# Altium PCB MCUBreakout.PcbDoc
Units mil, origin at the board's own origin, x right, y up, seen from the top; angles counter-clockwise.
Board outline 1377.95 x 1220.47 mil, 2 copper layers (Top Layer, Bottom Layer); 13 components, 30 nets, 93 pads, 24 vias.
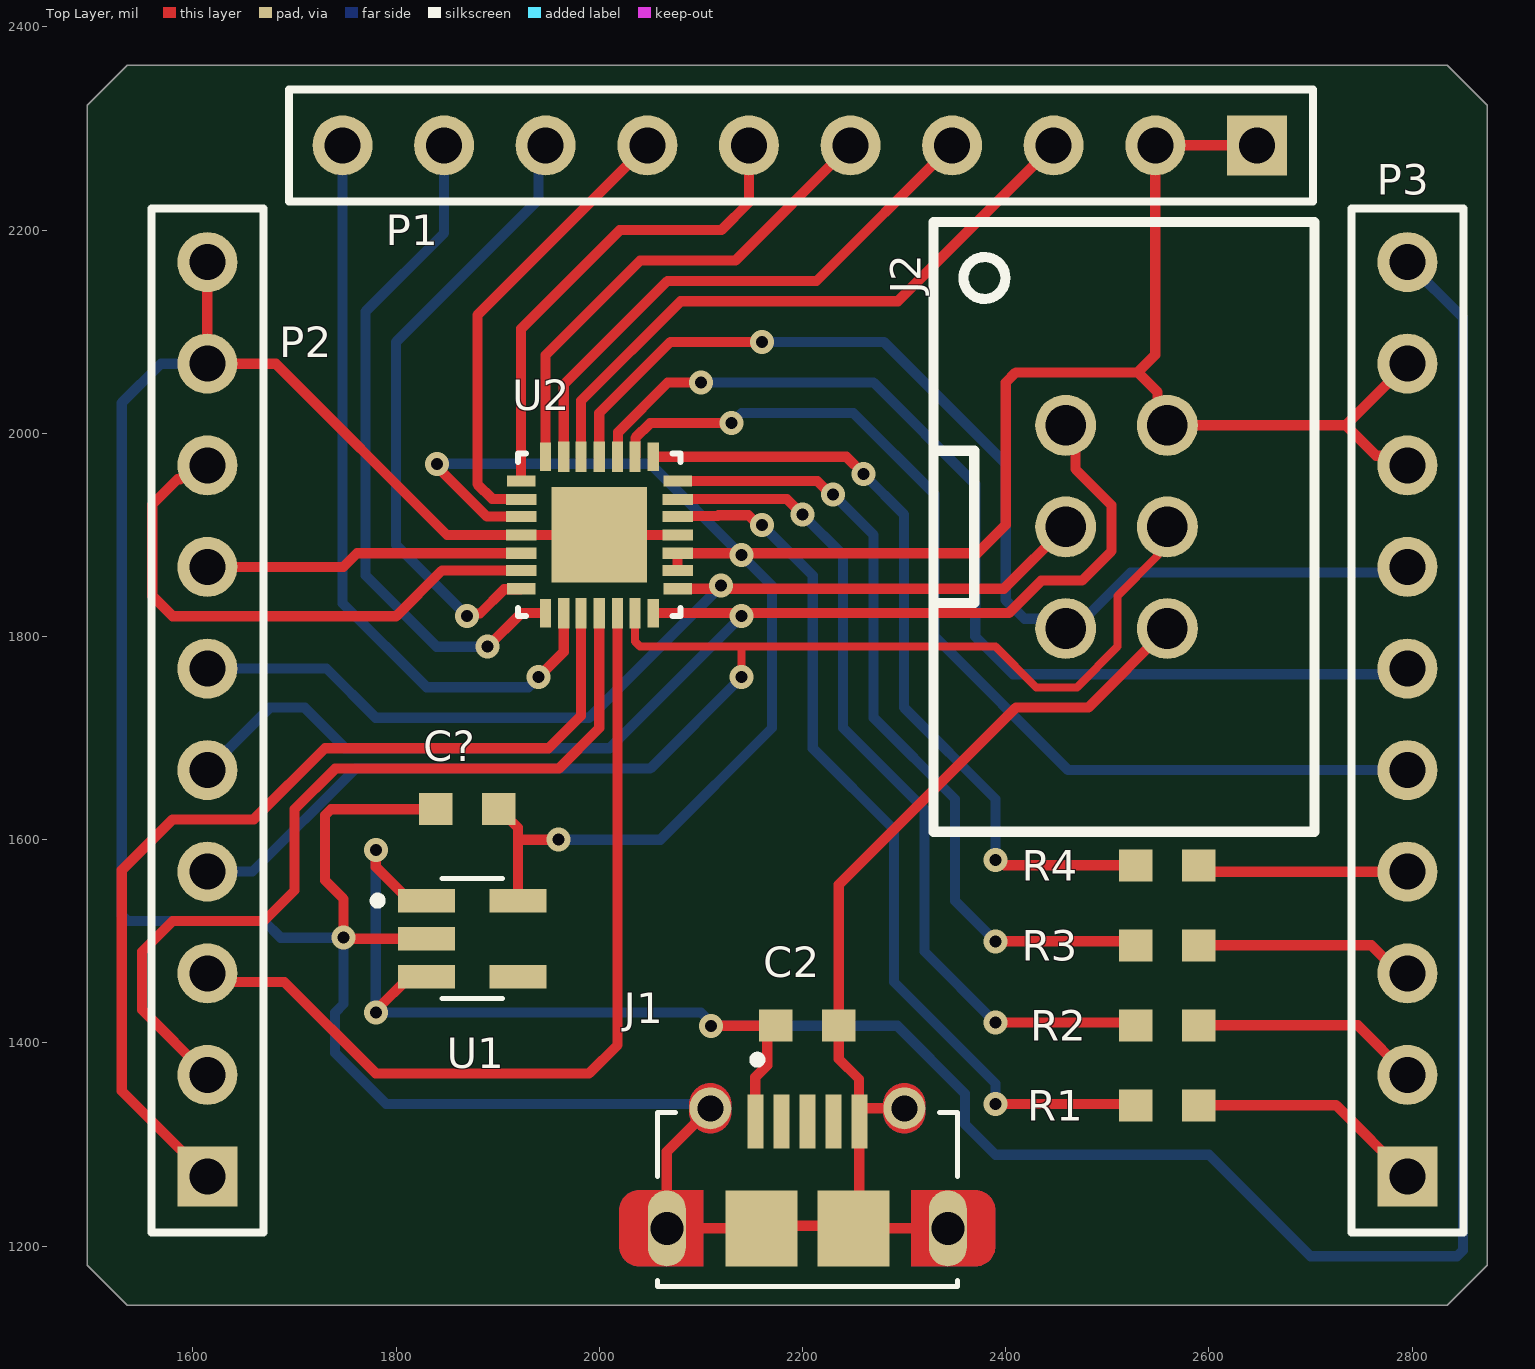
[diagram p0: Top Layer view]
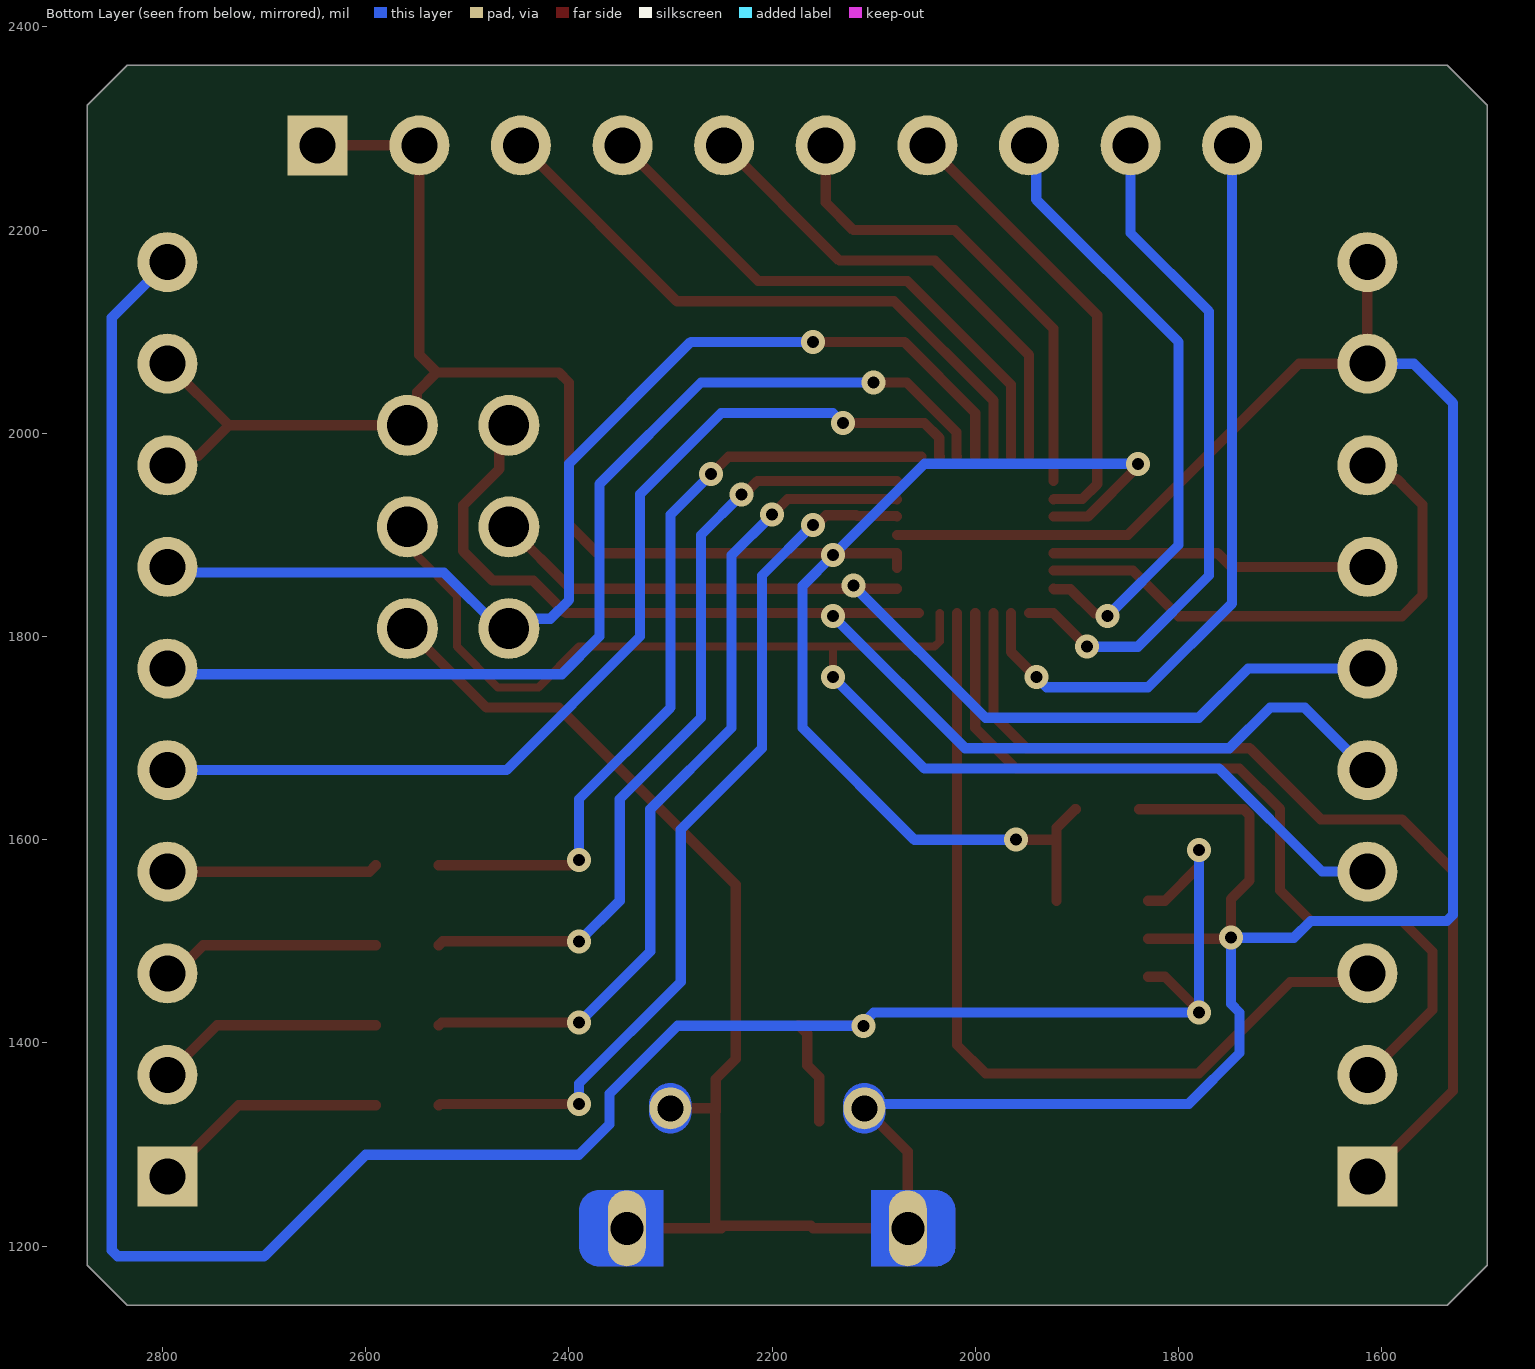
[diagram p1: Bottom Layer view, seen from below]
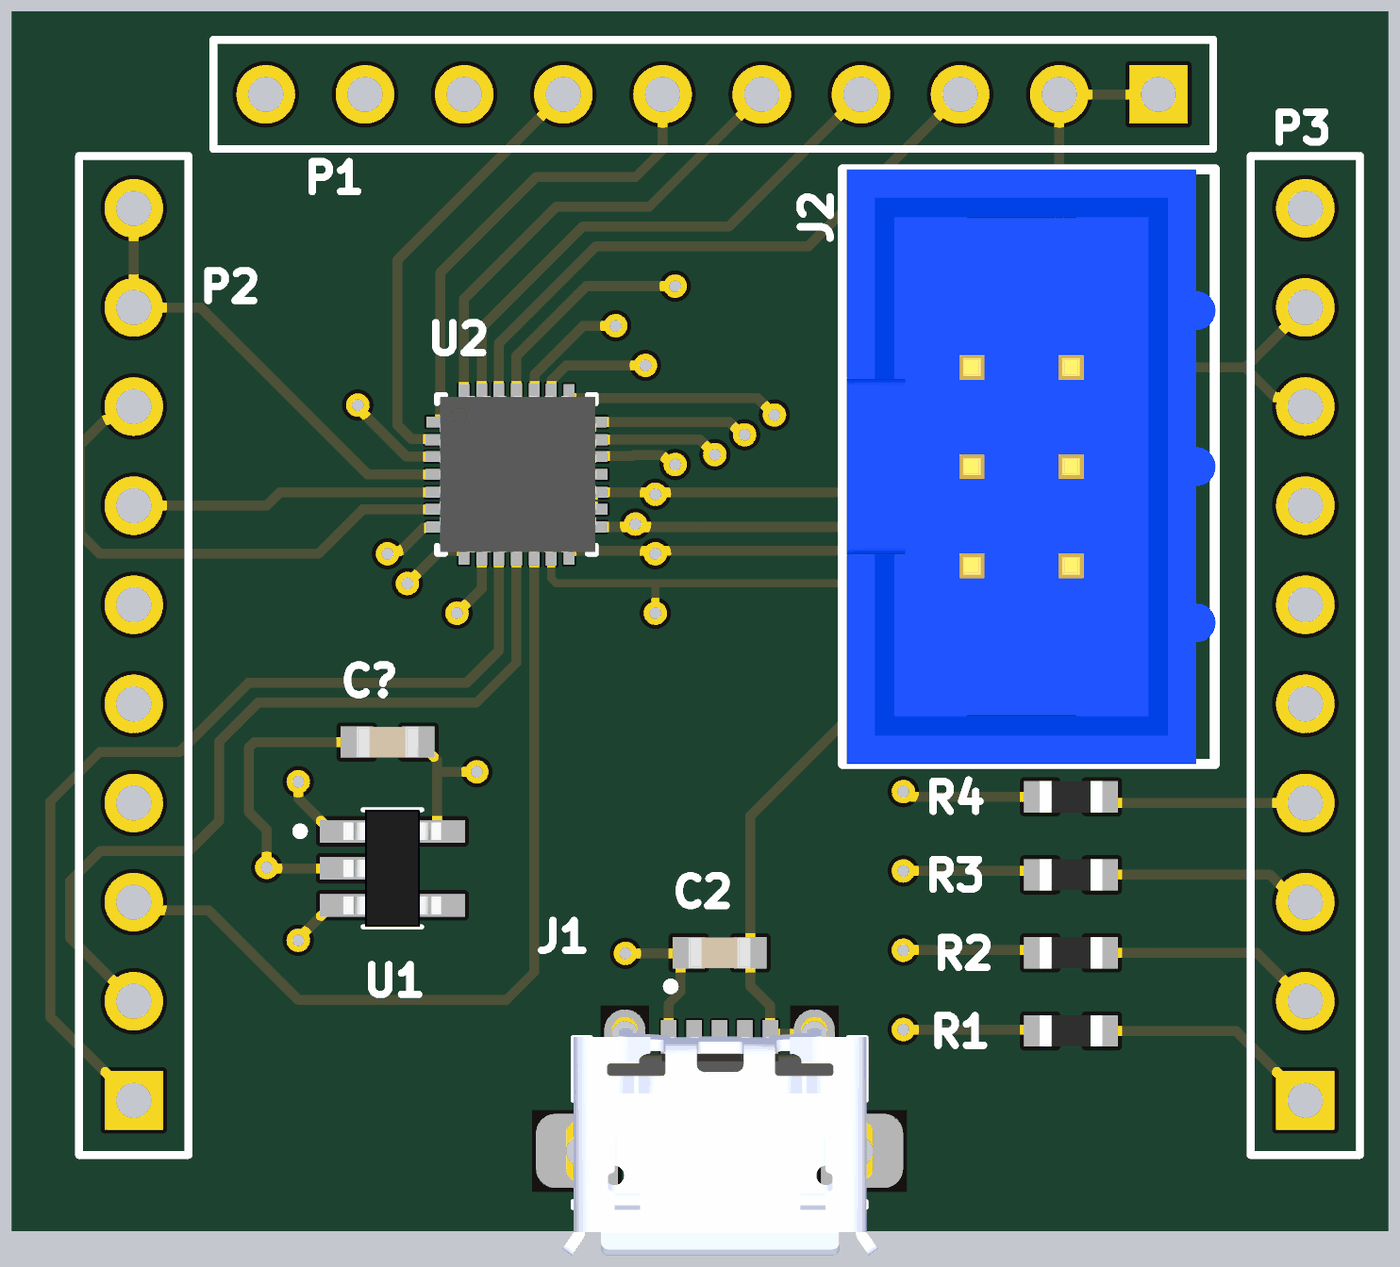
[diagram p2: 3D render of the assembled board from above, using the file's embedded part models]

## Layer stack, top to bottom
Top Solder: solder mask 0.4, Solder Resist, Dk 3.5
Top Layer: signal copper 1.4
Dielectric 1: dielectric 12.6, FR-4, Dk 4.8
Bottom Layer: signal copper 1.4
Bottom Solder: solder mask 0.4, Solder Resist, Dk 3.5

## Board outline
1496.06,1181.1 1535.43,1141.73 2834.65,1141.73 2874.02,1181.1 2874.02,2322.83 2834.65,2362.2 1535.43,2362.2 1496.06,2322.83

## Design rules (kind name [scope] priority, off if disabled: settings)
Clearance [All] p1: gap=6 ignorepadtopadclearanceinfootprint=FALSE
MinimumSolderMaskSliver [All] p1: minsoldermaskwidth=2
PolygonConnect [All] p1: connectstyle=Relief reliefconductorwidth=10 reliefentries=4 polygonreliefangle="90 Angle" airgapwidth=10
RoutingVias [All] p1: holewidth=28 width=50 viastyle="Through Hole" minholewidth=28 minwidth=50 maxholewidth=28 maxwidth=50
SilkToSilkClearance [All] p1: silktosilkclearance=5
SilkToSolderMaskClearance [IsPad] p1: minsilkscreentomaskgap=2 clearancetoexposedcopper=TRUE
SolderMaskExpansion [All] p1: expansion=4 istentingtop=FALSE
Width [All] p1: maxlimit=300 minlimit=7 preferedwidth=10
27 further rules are at their usual default settings.

## Components (designator, comment, footprint, x,y, rotation, side; value= is the part's Value field where it differs from the comment)
C2 "1nF" 0603_CAP 2204.72,1417.32 r180 top
C? "1nF" 0603_CAP 1870,1630 r0 top
J1 "ZX62D-B-5P8" Micro_USB 2204.72,1220.47 r0 top
J2 "6 Pin ISP Header" CONN_ISP_M 2459.06,2007.87 r270 top
P1 "HEADER_1x10" PIN10 2647.24,2283.46 r180 top
P2 "HEADER_1x10" PIN10 1614.17,1268.5 r90 top
P3 "HEADER_1x10" PIN10 2795.28,1268.5 r90 top
R1 "0Ω" 0603_RES 2559.06,1338.58 r0 top
R2 "0Ω" 0603_RES 2559.06,1417.32 r0 top
R3 "0Ω" 0603_RES 2559.06,1496.06 r0 top
R4 "0Ω" 0603_RES 2559.06,1574.8 r0 top
U1 "NCV551SN30T1G" TSOP-5-N 1874.92,1502.6 r0 top
U2 "ATMEGA328-MMHR" QFN-28_4x4 2000,1900 r0 top

## Footprints (in the part's own frame and the unit in brackets; to place one, negate y for a bottom-side part, rotate by r counter-clockwise, add the part's x,y. Pads: shape width x height; smd on the part's side, far side on the other; paste and mask are expansions set on the pad)
0603_CAP [mil]
  rect 33x31.5 smd: 1(-31,0) 2(31,0)
  body extent -32,-16 31,16, height 32
0603_RES [mil]
  rect 33x31.5 smd: 1(-31,0) 2(31,0)
  body extent -31,-16 31,16, height 18
CONN_ISP_M [mil]
  round 60 hole 40 mask+0: 1(0,0) 2(0,100) 3(100,0) 4(100,100) 5(200,0) 6(200,100)
  silkscreen extent -200,-130 400,245, body extent -200,-126 400,246, height 359
Micro_USB [mm]
  rect 0.4x1.35 smd mask+0.051: 1(-1.3,2.6) 2(-0.65,2.6) 3(0,2.6) 4(0.65,2.6) 5(1.3,2.6)
  round 1.05 hole 0.65: S1(-2.425,2.925) S2(2.425,2.925)
  oval 0.95x1.9 hole 0.825: S3(-3.512,-0.075) S6(3.512,-0.075)
  rect 1.8x1.9 smd: S4(-1.15,-0.075) S5(1.15,-0.075)
  Top Layer region: 3.1,-0.075 2.6,-0.075 2.6,0.875 4.2,0.875 4.213,0.875 4.239,0.874 4.265,0.871 4.291,0.867 4.317,0.861 4.342,0.855 4.367,0.846 4.391,0.837 4.415,0.826 4.439,0.815 4.461,0.801 4.483,0.787 4.504,0.772 4.525,0.755 4.544,0.738 4.563,0.719 4.58,0.7 4.597,0.679 4.612,0.658 4.626,0.636 4.64,0.614 4.651,0.59 4.662,0.566 4.671,0.542 4.68,0.517 4.686,0.492 4.692,0.466 4.696,0.44 4.699,0.414 4.7,0.388 4.7,0.375 4.7,-0.075 3.925,-0.075 3.925,0.4 3.925,0.407 3.924,0.422 3.923,0.436 3.92,0.45 3.917,0.464 3.914,0.478 3.909,0.492 3.904,0.505 3.898,0.518 3.892,0.531 3.885,0.544 3.877,0.556 3.868,0.567 3.859,0.579 3.85,0.589 3.839,0.6 3.829,0.609 3.817,0.618 3.806,0.627 3.794,0.635 3.781,0.642 3.768,0.648 3.755,0.654 3.742,0.659 3.728,0.664 3.714,0.667 3.7,0.67 3.686,0.673 3.672,0.674 3.657,0.675 3.65,0.675 3.4,0.675 3.392,0.675 3.376,0.674 3.361,0.673 3.345,0.67 3.33,0.667 3.315,0.663 3.3,0.658 3.285,0.652 3.271,0.646 3.257,0.639 3.243,0.631 3.23,0.622 3.217,0.613 3.205,0.603 3.193,0.593 3.182,0.582 3.172,0.57 3.162,0.558 3.153,0.545 3.144,0.532 3.136,0.518 3.129,0.504 3.123,0.49 3.117,0.475 3.112,0.46 3.108,0.445 3.105,0.43 3.102,0.414 3.101,0.399 3.1,0.383 3.1,0.375 3.1,-0.075
  Top Layer region: -3.1,-0.075 -2.6,-0.075 -2.6,-1.025 -4.2,-1.025 -4.213,-1.025 -4.239,-1.024 -4.265,-1.021 -4.291,-1.017 -4.317,-1.011 -4.342,-1.005 -4.367,-0.996 -4.391,-0.987 -4.415,-0.976 -4.439,-0.965 -4.461,-0.951 -4.483,-0.937 -4.504,-0.922 -4.525,-0.905 -4.544,-0.888 -4.563,-0.869 -4.58,-0.85 -4.597,-0.829 -4.612,-0.808 -4.626,-0.786 -4.64,-0.764 -4.651,-0.74 -4.662,-0.716 -4.671,-0.692 -4.68,-0.667 -4.686,-0.642 -4.692,-0.616 -4.696,-0.59 -4.699,-0.564 -4.7,-0.538 -4.7,-0.525 -4.7,-0.075 -3.925,-0.075 -3.925,-0.55 -3.925,-0.557 -3.924,-0.572 -3.923,-0.586 -3.92,-0.6 -3.917,-0.614 -3.914,-0.628 -3.909,-0.642 -3.904,-0.655 -3.898,-0.668 -3.892,-0.681 -3.885,-0.694 -3.877,-0.706 -3.868,-0.717 -3.859,-0.729 -3.85,-0.739 -3.839,-0.75 -3.829,-0.759 -3.817,-0.768 -3.806,-0.777 -3.794,-0.785 -3.781,-0.792 -3.768,-0.798 -3.755,-0.804 -3.742,-0.809 -3.728,-0.814 -3.714,-0.817 -3.7,-0.82 -3.686,-0.823 -3.672,-0.824 -3.657,-0.825 -3.65,-0.825 -3.4,-0.825 -3.392,-0.825 -3.376,-0.824 -3.361,-0.823 -3.345,-0.82 -3.33,-0.817 -3.315,-0.813 -3.3,-0.808 -3.285,-0.802 -3.271,-0.796 -3.257,-0.789 -3.243,-0.781 -3.23,-0.772 -3.217,-0.763 -3.205,-0.753 -3.193,-0.743 -3.182,-0.732 -3.172,-0.72 -3.162,-0.708 -3.153,-0.695 -3.144,-0.682 -3.136,-0.668 -3.129,-0.654 -3.123,-0.64 -3.117,-0.625 -3.112,-0.61 -3.108,-0.595 -3.105,-0.58 -3.102,-0.564 -3.101,-0.549 -3.1,-0.533 -3.1,-0.525 -3.1,-0.075
  Top Layer region: 2.6,-1.025 4.2,-1.025 4.213,-1.025 4.239,-1.024 4.265,-1.021 4.291,-1.017 4.317,-1.011 4.342,-1.005 4.367,-0.996 4.391,-0.987 4.415,-0.976 4.439,-0.965 4.461,-0.951 4.483,-0.937 4.504,-0.922 4.525,-0.905 4.544,-0.888 4.563,-0.869 4.58,-0.85 4.597,-0.829 4.612,-0.808 4.626,-0.786 4.64,-0.764 4.651,-0.74 4.662,-0.716 4.671,-0.692 4.68,-0.667 4.686,-0.642 4.692,-0.616 4.696,-0.59 4.699,-0.564 4.7,-0.538 4.7,-0.525 4.7,-0.075 3.925,-0.075 3.925,-0.525 3.925,-0.533 3.924,-0.549 3.923,-0.564 3.92,-0.58 3.917,-0.595 3.913,-0.61 3.908,-0.625 3.902,-0.64 3.896,-0.654 3.889,-0.668 3.881,-0.682 3.872,-0.695 3.863,-0.708 3.853,-0.72 3.843,-0.732 3.832,-0.743 3.82,-0.753 3.808,-0.763 3.795,-0.772 3.782,-0.781 3.768,-0.789 3.754,-0.796 3.74,-0.802 3.725,-0.808 3.71,-0.813 3.695,-0.817 3.68,-0.82 3.664,-0.823 3.649,-0.824 3.633,-0.825 3.625,-0.825 3.4,-0.825 3.392,-0.825 3.376,-0.824 3.361,-0.823 3.345,-0.82 3.33,-0.817 3.315,-0.813 3.3,-0.808 3.285,-0.802 3.271,-0.796 3.257,-0.789 3.243,-0.781 3.23,-0.772 3.217,-0.763 3.205,-0.753 3.193,-0.743 3.182,-0.732 3.172,-0.72 3.162,-0.708 3.153,-0.695 3.144,-0.682 3.136,-0.668 3.129,-0.654 3.123,-0.64 3.117,-0.625 3.112,-0.61 3.108,-0.595 3.105,-0.58 3.102,-0.564 3.101,-0.549 3.1,-0.533 3.1,-0.525 3.1,-0.075 2.6,-0.075 2.6,-1.025
  Top Layer region: -2.6,0.875 -4.2,0.875 -4.213,0.875 -4.239,0.874 -4.265,0.871 -4.291,0.867 -4.317,0.861 -4.342,0.855 -4.367,0.846 -4.391,0.837 -4.415,0.826 -4.439,0.815 -4.461,0.801 -4.483,0.787 -4.504,0.772 -4.525,0.755 -4.544,0.738 -4.563,0.719 -4.58,0.7 -4.597,0.679 -4.612,0.658 -4.626,0.636 -4.64,0.614 -4.651,0.59 -4.662,0.566 -4.671,0.542 -4.68,0.517 -4.686,0.492 -4.692,0.466 -4.696,0.44 -4.699,0.414 -4.7,0.388 -4.7,0.375 -4.7,-0.075 -3.925,-0.075 -3.925,0.375 -3.925,0.383 -3.924,0.399 -3.923,0.414 -3.92,0.43 -3.917,0.445 -3.913,0.46 -3.908,0.475 -3.902,0.49 -3.896,0.504 -3.889,0.518 -3.881,0.532 -3.872,0.545 -3.863,0.558 -3.853,0.57 -3.843,0.582 -3.832,0.593 -3.82,0.603 -3.808,0.613 -3.795,0.622 -3.782,0.631 -3.768,0.639 -3.754,0.646 -3.74,0.652 -3.725,0.658 -3.71,0.663 -3.695,0.667 -3.68,0.67 -3.664,0.673 -3.649,0.674 -3.633,0.675 -3.625,0.675 -3.4,0.675 -3.392,0.675 -3.376,0.674 -3.361,0.673 -3.345,0.67 -3.33,0.667 -3.315,0.663 -3.3,0.658 -3.285,0.652 -3.271,0.646 -3.257,0.639 -3.243,0.631 -3.23,0.622 -3.217,0.613 -3.205,0.603 -3.193,0.593 -3.182,0.582 -3.172,0.57 -3.162,0.558 -3.153,0.545 -3.144,0.532 -3.136,0.518 -3.129,0.504 -3.123,0.49 -3.117,0.475 -3.112,0.46 -3.108,0.445 -3.105,0.43 -3.102,0.414 -3.101,0.399 -3.1,0.383 -3.1,0.375 -3.1,-0.075 -2.6,-0.075 -2.6,0.875
  Top Layer region: 2.425,2.5 2.425,2.3 2.411,2.3 2.384,2.301 2.356,2.304 2.329,2.309 2.302,2.314 2.276,2.321 2.25,2.33 2.224,2.34 2.199,2.351 2.174,2.363 2.151,2.377 2.128,2.392 2.105,2.408 2.084,2.426 2.063,2.444 2.044,2.463 2.026,2.484 2.008,2.505 1.992,2.528 1.977,2.551 1.963,2.574 1.951,2.599 1.94,2.624 1.93,2.65 1.921,2.676 1.914,2.702 1.909,2.729 1.904,2.756 1.901,2.784 1.9,2.811 1.9,2.825 1.9,3.025 1.9,3.039 1.901,3.066 1.904,3.094 1.909,3.121 1.914,3.148 1.921,3.174 1.93,3.2 1.94,3.226 1.951,3.251 1.963,3.276 1.977,3.299 1.992,3.322 2.008,3.345 2.026,3.366 2.044,3.387 2.063,3.406 2.084,3.424 2.105,3.442 2.128,3.458 2.151,3.473 2.174,3.487 2.199,3.499 2.224,3.51 2.25,3.52 2.276,3.529 2.302,3.536 2.329,3.541 2.356,3.546 2.384,3.549 2.411,3.55 2.425,3.55 2.425,3.35 2.416,3.35 2.399,3.349 2.383,3.347 2.366,3.345 2.349,3.341 2.333,3.337 2.316,3.331 2.301,3.325 2.285,3.318 2.27,3.311 2.255,3.302 2.241,3.293 2.227,3.283 2.214,3.272 2.201,3.261 2.189,3.249 2.178,3.236 2.167,3.223 2.157,3.209 2.148,3.195 2.139,3.18 2.132,3.165 2.125,3.149 2.119,3.134 2.113,3.117 2.109,3.101 2.105,3.084 2.103,3.067 2.101,3.051 2.1,3.034 2.1,3.025 2.1,2.825 2.1,2.816 2.101,2.799 2.103,2.783 2.105,2.766 2.109,2.749 2.113,2.733 2.119,2.716 2.125,2.701 2.132,2.685 2.139,2.67 2.148,2.655 2.157,2.641 2.167,2.627 2.178,2.614 2.189,2.601 2.201,2.589 2.214,2.578 2.227,2.567 2.241,2.557 2.255,2.548 2.27,2.539 2.285,2.532 2.301,2.525 2.316,2.519 2.333,2.513 2.349,2.509 2.366,2.505 2.383,2.503 2.399,2.501 2.416,2.5 2.425,2.5
  Top Layer region: 2.425,3.35 2.425,3.55 2.439,3.55 2.466,3.549 2.494,3.546 2.521,3.541 2.548,3.536 2.574,3.529 2.6,3.52 2.626,3.51 2.651,3.499 2.676,3.487 2.699,3.473 2.722,3.458 2.745,3.442 2.766,3.424 2.787,3.406 2.806,3.387 2.824,3.366 2.842,3.345 2.858,3.322 2.873,3.299 2.887,3.276 2.899,3.251 2.91,3.226 2.92,3.2 2.929,3.174 2.936,3.148 2.941,3.121 2.946,3.094 2.949,3.066 2.95,3.039 2.95,3.025 2.95,2.825 2.95,2.811 2.949,2.784 2.946,2.756 2.941,2.729 2.936,2.702 2.929,2.676 2.92,2.65 2.91,2.624 2.899,2.599 2.887,2.574 2.873,2.551 2.858,2.528 2.842,2.505 2.824,2.484 2.806,2.463 2.787,2.444 2.766,2.426 2.745,2.408 2.722,2.392 2.699,2.377 2.676,2.363 2.651,2.351 2.626,2.34 2.6,2.33 2.574,2.321 2.548,2.314 2.521,2.309 2.494,2.304 2.466,2.301 2.439,2.3 2.425,2.3 2.425,2.5 2.434,2.5 2.451,2.501 2.467,2.503 2.484,2.505 2.501,2.509 2.517,2.513 2.534,2.519 2.549,2.525 2.565,2.532 2.58,2.539 2.595,2.548 2.609,2.557 2.623,2.567 2.636,2.578 2.649,2.589 2.661,2.601 2.672,2.614 2.683,2.627 2.693,2.641 2.702,2.655 2.711,2.67 2.718,2.685 2.725,2.701 2.731,2.716 2.737,2.733 2.741,2.749 2.745,2.766 2.747,2.783 2.749,2.799 2.75,2.816 2.75,2.825 2.75,3.025 2.75,3.034 2.749,3.051 2.747,3.067 2.745,3.084 2.741,3.101 2.737,3.117 2.731,3.134 2.725,3.149 2.718,3.165 2.711,3.18 2.702,3.195 2.693,3.209 2.683,3.223 2.672,3.236 2.661,3.249 2.649,3.261 2.636,3.272 2.623,3.283 2.609,3.293 2.595,3.302 2.58,3.311 2.565,3.318 2.549,3.325 2.534,3.331 2.517,3.337 2.501,3.341 2.484,3.345 2.467,3.347 2.451,3.349 2.434,3.35 2.425,3.35
  Top Layer region: -2.425,2.5 -2.425,2.3 -2.439,2.3 -2.466,2.301 -2.494,2.304 -2.521,2.309 -2.548,2.314 -2.574,2.321 -2.6,2.33 -2.626,2.34 -2.651,2.351 -2.676,2.363 -2.699,2.377 -2.722,2.392 -2.745,2.408 -2.766,2.426 -2.787,2.444 -2.806,2.463 -2.824,2.484 -2.842,2.505 -2.858,2.528 -2.873,2.551 -2.887,2.574 -2.899,2.599 -2.91,2.624 -2.92,2.65 -2.929,2.676 -2.936,2.702 -2.941,2.729 -2.946,2.756 -2.949,2.784 -2.95,2.811 -2.95,2.825 -2.95,3.025 -2.95,3.039 -2.949,3.066 -2.946,3.094 -2.941,3.121 -2.936,3.148 -2.929,3.174 -2.92,3.2 -2.91,3.226 -2.899,3.251 -2.887,3.276 -2.873,3.299 -2.858,3.322 -2.842,3.345 -2.824,3.366 -2.806,3.387 -2.787,3.406 -2.766,3.424 -2.745,3.442 -2.722,3.458 -2.699,3.473 -2.676,3.487 -2.651,3.499 -2.626,3.51 -2.6,3.52 -2.574,3.529 -2.548,3.536 -2.521,3.541 -2.494,3.546 -2.466,3.549 -2.439,3.55 -2.425,3.55 -2.425,3.35 -2.434,3.35 -2.451,3.349 -2.467,3.347 -2.484,3.345 -2.501,3.341 -2.517,3.337 -2.534,3.331 -2.549,3.325 -2.565,3.318 -2.58,3.311 -2.595,3.302 -2.609,3.293 -2.623,3.283 -2.636,3.272 -2.649,3.261 -2.661,3.249 -2.672,3.236 -2.683,3.223 -2.693,3.209 -2.702,3.195 -2.711,3.18 -2.718,3.165 -2.725,3.149 -2.731,3.134 -2.737,3.117 -2.741,3.101 -2.745,3.084 -2.747,3.067 -2.749,3.051 -2.75,3.034 -2.75,3.025 -2.75,2.825 -2.75,2.816 -2.749,2.799 -2.747,2.783 -2.745,2.766 -2.741,2.749 -2.737,2.733 -2.731,2.716 -2.725,2.701 -2.718,2.685 -2.711,2.67 -2.702,2.655 -2.693,2.641 -2.683,2.627 -2.672,2.614 -2.661,2.601 -2.649,2.589 -2.636,2.578 -2.623,2.567 -2.609,2.557 -2.595,2.548 -2.58,2.539 -2.565,2.532 -2.549,2.525 -2.534,2.519 -2.517,2.513 -2.501,2.509 -2.484,2.505 -2.467,2.503 -2.451,2.501 -2.434,2.5 -2.425,2.5
  Top Layer region: -2.425,3.35 -2.425,3.55 -2.411,3.55 -2.384,3.549 -2.356,3.546 -2.329,3.541 -2.302,3.536 -2.276,3.529 -2.25,3.52 -2.224,3.51 -2.199,3.499 -2.174,3.487 -2.151,3.473 -2.128,3.458 -2.105,3.442 -2.084,3.424 -2.063,3.406 -2.044,3.387 -2.026,3.366 -2.008,3.345 -1.992,3.322 -1.977,3.299 -1.963,3.276 -1.951,3.251 -1.94,3.226 -1.93,3.2 -1.921,3.174 -1.914,3.148 -1.909,3.121 -1.904,3.094 -1.901,3.066 -1.9,3.039 -1.9,3.025 -1.9,2.825 -1.9,2.811 -1.901,2.784 -1.904,2.756 -1.909,2.729 -1.914,2.702 -1.921,2.676 -1.93,2.65 -1.94,2.624 -1.951,2.599 -1.963,2.574 -1.977,2.551 -1.992,2.528 -2.008,2.505 -2.026,2.484 -2.044,2.463 -2.063,2.444 -2.084,2.426 -2.105,2.408 -2.128,2.392 -2.151,2.377 -2.174,2.363 -2.199,2.351 -2.224,2.34 -2.25,2.33 -2.276,2.321 -2.302,2.314 -2.329,2.309 -2.356,2.304 -2.384,2.301 -2.411,2.3 -2.425,2.3 -2.425,2.5 -2.416,2.5 -2.399,2.501 -2.383,2.503 -2.366,2.505 -2.349,2.509 -2.333,2.513 -2.316,2.519 -2.301,2.525 -2.285,2.532 -2.27,2.539 -2.255,2.548 -2.241,2.557 -2.227,2.567 -2.214,2.578 -2.201,2.589 -2.189,2.601 -2.178,2.614 -2.167,2.627 -2.157,2.641 -2.148,2.655 -2.139,2.67 -2.132,2.685 -2.125,2.701 -2.119,2.716 -2.113,2.733 -2.109,2.749 -2.105,2.766 -2.103,2.783 -2.101,2.799 -2.1,2.816 -2.1,2.825 -2.1,3.025 -2.1,3.034 -2.101,3.051 -2.103,3.067 -2.105,3.084 -2.109,3.101 -2.113,3.117 -2.119,3.134 -2.125,3.149 -2.132,3.165 -2.139,3.18 -2.148,3.195 -2.157,3.209 -2.167,3.223 -2.178,3.236 -2.189,3.249 -2.201,3.261 -2.214,3.272 -2.227,3.283 -2.241,3.293 -2.255,3.302 -2.27,3.311 -2.285,3.318 -2.301,3.325 -2.316,3.331 -2.333,3.337 -2.349,3.341 -2.366,3.345 -2.383,3.347 -2.399,3.349 -2.416,3.35 -2.425,3.35
  Bottom Layer region: 3.1,-0.075 2.6,-0.075 2.6,0.875 4.2,0.875 4.213,0.875 4.239,0.874 4.265,0.871 4.291,0.867 4.317,0.861 4.342,0.855 4.367,0.846 4.391,0.837 4.415,0.826 4.439,0.815 4.461,0.801 4.483,0.787 4.504,0.772 4.525,0.755 4.544,0.738 4.563,0.719 4.58,0.7 4.597,0.679 4.612,0.658 4.626,0.636 4.64,0.614 4.651,0.59 4.662,0.566 4.671,0.542 4.68,0.517 4.686,0.492 4.692,0.466 4.696,0.44 4.699,0.414 4.7,0.388 4.7,0.375 4.7,-0.075 3.925,-0.075 3.925,0.4 3.925,0.407 3.924,0.422 3.923,0.436 3.92,0.45 3.917,0.464 3.914,0.478 3.909,0.492 3.904,0.505 3.898,0.518 3.892,0.531 3.885,0.544 3.877,0.556 3.868,0.567 3.859,0.579 3.85,0.589 3.839,0.6 3.829,0.609 3.817,0.618 3.806,0.627 3.794,0.635 3.781,0.642 3.768,0.648 3.755,0.654 3.742,0.659 3.728,0.664 3.714,0.667 3.7,0.67 3.686,0.673 3.672,0.674 3.657,0.675 3.65,0.675 3.4,0.675 3.392,0.675 3.376,0.674 3.361,0.673 3.345,0.67 3.33,0.667 3.315,0.663 3.3,0.658 3.285,0.652 3.271,0.646 3.257,0.639 3.243,0.631 3.23,0.622 3.217,0.613 3.205,0.603 3.193,0.593 3.182,0.582 3.172,0.57 3.162,0.558 3.153,0.545 3.144,0.532 3.136,0.518 3.129,0.504 3.123,0.49 3.117,0.475 3.112,0.46 3.108,0.445 3.105,0.43 3.102,0.414 3.101,0.399 3.1,0.383 3.1,0.375 3.1,-0.075
  Bottom Layer region: -3.1,-0.075 -2.6,-0.075 -2.6,-1.025 -4.2,-1.025 -4.213,-1.025 -4.239,-1.024 -4.265,-1.021 -4.291,-1.017 -4.317,-1.011 -4.342,-1.005 -4.367,-0.996 -4.391,-0.987 -4.415,-0.976 -4.439,-0.965 -4.461,-0.951 -4.483,-0.937 -4.504,-0.922 -4.525,-0.905 -4.544,-0.888 -4.563,-0.869 -4.58,-0.85 -4.597,-0.829 -4.612,-0.808 -4.626,-0.786 -4.64,-0.764 -4.651,-0.74 -4.662,-0.716 -4.671,-0.692 -4.68,-0.667 -4.686,-0.642 -4.692,-0.616 -4.696,-0.59 -4.699,-0.564 -4.7,-0.538 -4.7,-0.525 -4.7,-0.075 -3.925,-0.075 -3.925,-0.55 -3.925,-0.557 -3.924,-0.572 -3.923,-0.586 -3.92,-0.6 -3.917,-0.614 -3.914,-0.628 -3.909,-0.642 -3.904,-0.655 -3.898,-0.668 -3.892,-0.681 -3.885,-0.694 -3.877,-0.706 -3.868,-0.717 -3.859,-0.729 -3.85,-0.739 -3.839,-0.75 -3.829,-0.759 -3.817,-0.768 -3.806,-0.777 -3.794,-0.785 -3.781,-0.792 -3.768,-0.798 -3.755,-0.804 -3.742,-0.809 -3.728,-0.814 -3.714,-0.817 -3.7,-0.82 -3.686,-0.823 -3.672,-0.824 -3.657,-0.825 -3.65,-0.825 -3.4,-0.825 -3.392,-0.825 -3.376,-0.824 -3.361,-0.823 -3.345,-0.82 -3.33,-0.817 -3.315,-0.813 -3.3,-0.808 -3.285,-0.802 -3.271,-0.796 -3.257,-0.789 -3.243,-0.781 -3.23,-0.772 -3.217,-0.763 -3.205,-0.753 -3.193,-0.743 -3.182,-0.732 -3.172,-0.72 -3.162,-0.708 -3.153,-0.695 -3.144,-0.682 -3.136,-0.668 -3.129,-0.654 -3.123,-0.64 -3.117,-0.625 -3.112,-0.61 -3.108,-0.595 -3.105,-0.58 -3.102,-0.564 -3.101,-0.549 -3.1,-0.533 -3.1,-0.525 -3.1,-0.075
  Bottom Layer region: 2.6,-1.025 4.2,-1.025 4.213,-1.025 4.239,-1.024 4.265,-1.021 4.291,-1.017 4.317,-1.011 4.342,-1.005 4.367,-0.996 4.391,-0.987 4.415,-0.976 4.439,-0.965 4.461,-0.951 4.483,-0.937 4.504,-0.922 4.525,-0.905 4.544,-0.888 4.563,-0.869 4.58,-0.85 4.597,-0.829 4.612,-0.808 4.626,-0.786 4.64,-0.764 4.651,-0.74 4.662,-0.716 4.671,-0.692 4.68,-0.667 4.686,-0.642 4.692,-0.616 4.696,-0.59 4.699,-0.564 4.7,-0.538 4.7,-0.525 4.7,-0.075 3.925,-0.075 3.925,-0.525 3.925,-0.533 3.924,-0.549 3.923,-0.564 3.92,-0.58 3.917,-0.595 3.913,-0.61 3.908,-0.625 3.902,-0.64 3.896,-0.654 3.889,-0.668 3.881,-0.682 3.872,-0.695 3.863,-0.708 3.853,-0.72 3.843,-0.732 3.832,-0.743 3.82,-0.753 3.808,-0.763 3.795,-0.772 3.782,-0.781 3.768,-0.789 3.754,-0.796 3.74,-0.802 3.725,-0.808 3.71,-0.813 3.695,-0.817 3.68,-0.82 3.664,-0.823 3.649,-0.824 3.633,-0.825 3.625,-0.825 3.4,-0.825 3.392,-0.825 3.376,-0.824 3.361,-0.823 3.345,-0.82 3.33,-0.817 3.315,-0.813 3.3,-0.808 3.285,-0.802 3.271,-0.796 3.257,-0.789 3.243,-0.781 3.23,-0.772 3.217,-0.763 3.205,-0.753 3.193,-0.743 3.182,-0.732 3.172,-0.72 3.162,-0.708 3.153,-0.695 3.144,-0.682 3.136,-0.668 3.129,-0.654 3.123,-0.64 3.117,-0.625 3.112,-0.61 3.108,-0.595 3.105,-0.58 3.102,-0.564 3.101,-0.549 3.1,-0.533 3.1,-0.525 3.1,-0.075 2.6,-0.075 2.6,-1.025
  Bottom Layer region: -2.6,0.875 -4.2,0.875 -4.213,0.875 -4.239,0.874 -4.265,0.871 -4.291,0.867 -4.317,0.861 -4.342,0.855 -4.367,0.846 -4.391,0.837 -4.415,0.826 -4.439,0.815 -4.461,0.801 -4.483,0.787 -4.504,0.772 -4.525,0.755 -4.544,0.738 -4.563,0.719 -4.58,0.7 -4.597,0.679 -4.612,0.658 -4.626,0.636 -4.64,0.614 -4.651,0.59 -4.662,0.566 -4.671,0.542 -4.68,0.517 -4.686,0.492 -4.692,0.466 -4.696,0.44 -4.699,0.414 -4.7,0.388 -4.7,0.375 -4.7,-0.075 -3.925,-0.075 -3.925,0.375 -3.925,0.383 -3.924,0.399 -3.923,0.414 -3.92,0.43 -3.917,0.445 -3.913,0.46 -3.908,0.475 -3.902,0.49 -3.896,0.504 -3.889,0.518 -3.881,0.532 -3.872,0.545 -3.863,0.558 -3.853,0.57 -3.843,0.582 -3.832,0.593 -3.82,0.603 -3.808,0.613 -3.795,0.622 -3.782,0.631 -3.768,0.639 -3.754,0.646 -3.74,0.652 -3.725,0.658 -3.71,0.663 -3.695,0.667 -3.68,0.67 -3.664,0.673 -3.649,0.674 -3.633,0.675 -3.625,0.675 -3.4,0.675 -3.392,0.675 -3.376,0.674 -3.361,0.673 -3.345,0.67 -3.33,0.667 -3.315,0.663 -3.3,0.658 -3.285,0.652 -3.271,0.646 -3.257,0.639 -3.243,0.631 -3.23,0.622 -3.217,0.613 -3.205,0.603 -3.193,0.593 -3.182,0.582 -3.172,0.57 -3.162,0.558 -3.153,0.545 -3.144,0.532 -3.136,0.518 -3.129,0.504 -3.123,0.49 -3.117,0.475 -3.112,0.46 -3.108,0.445 -3.105,0.43 -3.102,0.414 -3.101,0.399 -3.1,0.383 -3.1,0.375 -3.1,-0.075 -2.6,-0.075 -2.6,0.875
  Bottom Layer region: 2.425,2.5 2.425,2.3 2.411,2.3 2.384,2.301 2.356,2.304 2.329,2.309 2.302,2.314 2.276,2.321 2.25,2.33 2.224,2.34 2.199,2.351 2.174,2.363 2.151,2.377 2.128,2.392 2.105,2.408 2.084,2.426 2.063,2.444 2.044,2.463 2.026,2.484 2.008,2.505 1.992,2.528 1.977,2.551 1.963,2.574 1.951,2.599 1.94,2.624 1.93,2.65 1.921,2.676 1.914,2.702 1.909,2.729 1.904,2.756 1.901,2.784 1.9,2.811 1.9,2.825 1.9,3.025 1.9,3.039 1.901,3.066 1.904,3.094 1.909,3.121 1.914,3.148 1.921,3.174 1.93,3.2 1.94,3.226 1.951,3.251 1.963,3.276 1.977,3.299 1.992,3.322 2.008,3.345 2.026,3.366 2.044,3.387 2.063,3.406 2.084,3.424 2.105,3.442 2.128,3.458 2.151,3.473 2.174,3.487 2.199,3.499 2.224,3.51 2.25,3.52 2.276,3.529 2.302,3.536 2.329,3.541 2.356,3.546 2.384,3.549 2.411,3.55 2.425,3.55 2.425,3.35 2.416,3.35 2.399,3.349 2.383,3.347 2.366,3.345 2.349,3.341 2.333,3.337 2.316,3.331 2.301,3.325 2.285,3.318 2.27,3.311 2.255,3.302 2.241,3.293 2.227,3.283 2.214,3.272 2.201,3.261 2.189,3.249 2.178,3.236 2.167,3.223 2.157,3.209 2.148,3.195 2.139,3.18 2.132,3.165 2.125,3.149 2.119,3.134 2.113,3.117 2.109,3.101 2.105,3.084 2.103,3.067 2.101,3.051 2.1,3.034 2.1,3.025 2.1,2.825 2.1,2.816 2.101,2.799 2.103,2.783 2.105,2.766 2.109,2.749 2.113,2.733 2.119,2.716 2.125,2.701 2.132,2.685 2.139,2.67 2.148,2.655 2.157,2.641 2.167,2.627 2.178,2.614 2.189,2.601 2.201,2.589 2.214,2.578 2.227,2.567 2.241,2.557 2.255,2.548 2.27,2.539 2.285,2.532 2.301,2.525 2.316,2.519 2.333,2.513 2.349,2.509 2.366,2.505 2.383,2.503 2.399,2.501 2.416,2.5 2.425,2.5
  Bottom Layer region: 2.425,3.35 2.425,3.55 2.439,3.55 2.466,3.549 2.494,3.546 2.521,3.541 2.548,3.536 2.574,3.529 2.6,3.52 2.626,3.51 2.651,3.499 2.676,3.487 2.699,3.473 2.722,3.458 2.745,3.442 2.766,3.424 2.787,3.406 2.806,3.387 2.824,3.366 2.842,3.345 2.858,3.322 2.873,3.299 2.887,3.276 2.899,3.251 2.91,3.226 2.92,3.2 2.929,3.174 2.936,3.148 2.941,3.121 2.946,3.094 2.949,3.066 2.95,3.039 2.95,3.025 2.95,2.825 2.95,2.811 2.949,2.784 2.946,2.756 2.941,2.729 2.936,2.702 2.929,2.676 2.92,2.65 2.91,2.624 2.899,2.599 2.887,2.574 2.873,2.551 2.858,2.528 2.842,2.505 2.824,2.484 2.806,2.463 2.787,2.444 2.766,2.426 2.745,2.408 2.722,2.392 2.699,2.377 2.676,2.363 2.651,2.351 2.626,2.34 2.6,2.33 2.574,2.321 2.548,2.314 2.521,2.309 2.494,2.304 2.466,2.301 2.439,2.3 2.425,2.3 2.425,2.5 2.434,2.5 2.451,2.501 2.467,2.503 2.484,2.505 2.501,2.509 2.517,2.513 2.534,2.519 2.549,2.525 2.565,2.532 2.58,2.539 2.595,2.548 2.609,2.557 2.623,2.567 2.636,2.578 2.649,2.589 2.661,2.601 2.672,2.614 2.683,2.627 2.693,2.641 2.702,2.655 2.711,2.67 2.718,2.685 2.725,2.701 2.731,2.716 2.737,2.733 2.741,2.749 2.745,2.766 2.747,2.783 2.749,2.799 2.75,2.816 2.75,2.825 2.75,3.025 2.75,3.034 2.749,3.051 2.747,3.067 2.745,3.084 2.741,3.101 2.737,3.117 2.731,3.134 2.725,3.149 2.718,3.165 2.711,3.18 2.702,3.195 2.693,3.209 2.683,3.223 2.672,3.236 2.661,3.249 2.649,3.261 2.636,3.272 2.623,3.283 2.609,3.293 2.595,3.302 2.58,3.311 2.565,3.318 2.549,3.325 2.534,3.331 2.517,3.337 2.501,3.341 2.484,3.345 2.467,3.347 2.451,3.349 2.434,3.35 2.425,3.35
  Bottom Layer region: -2.425,2.5 -2.425,2.3 -2.439,2.3 -2.466,2.301 -2.494,2.304 -2.521,2.309 -2.548,2.314 -2.574,2.321 -2.6,2.33 -2.626,2.34 -2.651,2.351 -2.676,2.363 -2.699,2.377 -2.722,2.392 -2.745,2.408 -2.766,2.426 -2.787,2.444 -2.806,2.463 -2.824,2.484 -2.842,2.505 -2.858,2.528 -2.873,2.551 -2.887,2.574 -2.899,2.599 -2.91,2.624 -2.92,2.65 -2.929,2.676 -2.936,2.702 -2.941,2.729 -2.946,2.756 -2.949,2.784 -2.95,2.811 -2.95,2.825 -2.95,3.025 -2.95,3.039 -2.949,3.066 -2.946,3.094 -2.941,3.121 -2.936,3.148 -2.929,3.174 -2.92,3.2 -2.91,3.226 -2.899,3.251 -2.887,3.276 -2.873,3.299 -2.858,3.322 -2.842,3.345 -2.824,3.366 -2.806,3.387 -2.787,3.406 -2.766,3.424 -2.745,3.442 -2.722,3.458 -2.699,3.473 -2.676,3.487 -2.651,3.499 -2.626,3.51 -2.6,3.52 -2.574,3.529 -2.548,3.536 -2.521,3.541 -2.494,3.546 -2.466,3.549 -2.439,3.55 -2.425,3.55 -2.425,3.35 -2.434,3.35 -2.451,3.349 -2.467,3.347 -2.484,3.345 -2.501,3.341 -2.517,3.337 -2.534,3.331 -2.549,3.325 -2.565,3.318 -2.58,3.311 -2.595,3.302 -2.609,3.293 -2.623,3.283 -2.636,3.272 -2.649,3.261 -2.661,3.249 -2.672,3.236 -2.683,3.223 -2.693,3.209 -2.702,3.195 -2.711,3.18 -2.718,3.165 -2.725,3.149 -2.731,3.134 -2.737,3.117 -2.741,3.101 -2.745,3.084 -2.747,3.067 -2.749,3.051 -2.75,3.034 -2.75,3.025 -2.75,2.825 -2.75,2.816 -2.749,2.799 -2.747,2.783 -2.745,2.766 -2.741,2.749 -2.737,2.733 -2.731,2.716 -2.725,2.701 -2.718,2.685 -2.711,2.67 -2.702,2.655 -2.693,2.641 -2.683,2.627 -2.672,2.614 -2.661,2.601 -2.649,2.589 -2.636,2.578 -2.623,2.567 -2.609,2.557 -2.595,2.548 -2.58,2.539 -2.565,2.532 -2.549,2.525 -2.534,2.519 -2.517,2.513 -2.501,2.509 -2.484,2.505 -2.467,2.503 -2.451,2.501 -2.434,2.5 -2.425,2.5
  Bottom Layer region: -2.425,3.35 -2.425,3.55 -2.411,3.55 -2.384,3.549 -2.356,3.546 -2.329,3.541 -2.302,3.536 -2.276,3.529 -2.25,3.52 -2.224,3.51 -2.199,3.499 -2.174,3.487 -2.151,3.473 -2.128,3.458 -2.105,3.442 -2.084,3.424 -2.063,3.406 -2.044,3.387 -2.026,3.366 -2.008,3.345 -1.992,3.322 -1.977,3.299 -1.963,3.276 -1.951,3.251 -1.94,3.226 -1.93,3.2 -1.921,3.174 -1.914,3.148 -1.909,3.121 -1.904,3.094 -1.901,3.066 -1.9,3.039 -1.9,3.025 -1.9,2.825 -1.9,2.811 -1.901,2.784 -1.904,2.756 -1.909,2.729 -1.914,2.702 -1.921,2.676 -1.93,2.65 -1.94,2.624 -1.951,2.599 -1.963,2.574 -1.977,2.551 -1.992,2.528 -2.008,2.505 -2.026,2.484 -2.044,2.463 -2.063,2.444 -2.084,2.426 -2.105,2.408 -2.128,2.392 -2.151,2.377 -2.174,2.363 -2.199,2.351 -2.224,2.34 -2.25,2.33 -2.276,2.321 -2.302,2.314 -2.329,2.309 -2.356,2.304 -2.384,2.301 -2.411,2.3 -2.425,2.3 -2.425,2.5 -2.416,2.5 -2.399,2.501 -2.383,2.503 -2.366,2.505 -2.349,2.509 -2.333,2.513 -2.316,2.519 -2.301,2.525 -2.285,2.532 -2.27,2.539 -2.255,2.548 -2.241,2.557 -2.227,2.567 -2.214,2.578 -2.201,2.589 -2.189,2.601 -2.178,2.614 -2.167,2.627 -2.157,2.641 -2.148,2.655 -2.139,2.67 -2.132,2.685 -2.125,2.701 -2.119,2.716 -2.113,2.733 -2.109,2.749 -2.105,2.766 -2.103,2.783 -2.101,2.799 -2.1,2.816 -2.1,2.825 -2.1,3.025 -2.1,3.034 -2.101,3.051 -2.103,3.067 -2.105,3.084 -2.109,3.101 -2.113,3.117 -2.119,3.134 -2.125,3.149 -2.132,3.165 -2.139,3.18 -2.148,3.195 -2.157,3.209 -2.167,3.223 -2.178,3.236 -2.189,3.249 -2.201,3.261 -2.214,3.272 -2.227,3.283 -2.241,3.293 -2.255,3.302 -2.27,3.311 -2.285,3.318 -2.301,3.325 -2.316,3.331 -2.333,3.337 -2.349,3.341 -2.366,3.345 -2.383,3.347 -2.399,3.349 -2.416,3.35 -2.425,3.35
  silkscreen extent -3.75,-1.53 3.75,4.24, body extent -4.03,-2.75 4.06,3.05, height 2.71
PIN10 [mm] "4x1 Header 0.1mm"
  rect 1.5x1.5 hole 0.9: 1(0,0)
  round 1.5 hole 0.9: 2(2.54,0) 3(5.08,0) 4(7.62,0) 5(10.16,0) 6(12.7,0) 7(15.24,0) 8(17.78,0) 9(20.32,0) 10(22.86,0)
  silkscreen extent -1.4,-1.4 24.2,1.4
QFN-28_4x4 [mil]
  rect 28x11 smd mask+2: 1(-77,53) 7(-77,-53) 15(77,-53) 21(77,53)
  rect 30x11 smd mask+2: 2(-77,35) 3(-77,18) 4(-77,0) 5(-77,-18) 6(-77,-35) 16(77,-35) 17(77,-18) 18(77,0) 19(77,18) 20(77,35)
  rect 11x28 smd mask+2: 8(-53,-77) 14(53,-77) 22(53,77) 28(-53,77)
  rect 11x30 smd mask+2: 9(-35,-77) 10(-18,-77) 11(0,-77) 12(18,-77) 13(35,-77) 23(35,77) 24(18,77) 25(0,77) 26(-18,77) 27(-35,77)
  rect 94x94 smd: 29(0,0)
  silkscreen extent -80,-80 80,80, body extent -77,-79 80,79, height 30
TSOP-5-N [mm]
  rect 1.42x0.58 smd: 1(-1.145,0.95) 2(-1.145,0) 3(-1.145,-0.95) 4(1.145,-0.95) 5(1.145,0.95)
  silkscreen extent -2.46,-1.5 0.75,1.5, body extent -1.25,-1.5 1.25,1.5, height 1.11

## Part data
C2 C?: library part CAP_1N_0603, "CAP CER 1000PF 200V X7R 0603", Supplier Part Number 1=399-11556-1-ND, LatestRevisionDate=17-Jul-2002, LatestRevisionNote="Re-released for DXP Platform.", PackageDescription="Radial Cap, Thru-Hole; 2 Leads; 0.3 in Pin Spacing", PackageReference=RAD-0.3, Published=8-Jun-2000, Publisher="Altium Limited", Supplier 1=Digi-Key
J1: library part MicroUSB, "SMD+DIP Micro USB; MICRO-B-SMD", Package=None, Supplier Part Number 1=H125272CT-ND, Availability=Unavailable, MF=Hirose, MP=ZX62D-B-5P8, Price=None, SnapEDA_Link=https://www.snapeda.com/parts/ZX62D-B-5P8/Hirose%20Electric%20Co%20Ltd/view-part/?ref=snap, Supplier 1=Digi-Key
J2: library part ISP
R1 R2 R3 R4: library part RES_0R_0603, "RES SMD 0 OHM JUMPER 1/10W 0603", Supplier Part Number 1=311-0.0GRDKR-ND, LatestRevisionDate=17-Jul-2002, LatestRevisionNote="Re-released for DXP Platform.", PackageDescription="Axial Device, Thru-Hole; 2 Leads; 0.3 in Pin Spacing", PackageReference=AXIAL-0.3, Published=8-Jun-2000, Publisher="Altium Limited", Supplier 1=Digi-Key
U1: "IC REG LINEAR 3V 150MA 5TSOP", Supplier Part Number 1=488-NCV551SN30T1GCT-ND, Supplier 1=Digi-Key
U2: "IC MCU 8BIT 32KB FLASH 28VQFN", Package="PDIP-28 Microchip", Supplier Part Number 1=ATMEGA328-MMHRCT-ND, Availability=Unavailable, MF=Microchip, MP=ATMEGA328P-PU, Price=None, SnapEDA_Link=https://www.snapeda.com/parts/ATMEGA328P-PU/Microchip/view-part/?ref=snap, Supplier 1=Digi-Key

## Via types
v1: diameter 23.62, hole 11.81, Top Layer to Bottom Layer, 24 vias

## Nets (pads, with @x,y where several pads share a name; then routed paths per layer and width w, separated by ;. In a path a pad name is that pad's centre, name@x,y a point inside that pad or via, vN(x,y) a via of type N, cw(c..) or ccw(c..) an arc to the next point about the centre after c; other vN are vias at no path point)
+5: C2.2 J1.1 P3.10 U1.1 U1.3 | length 2655.7
  Top Layer w10: v1(1780,1430) 1780,1431.89 1813.31,1465.2 U1.3 ; v1(1780,1590) 1780,1573.31 1813.31,1540 U1.1 ; v1(2109.83,1416.84) C2.2@2173.23,1416.84 ; J1.1 2153.54,1366.14 2165.35,1377.95 2165.35,1408.96 C2.2@2173.23,1416.84 ; C2.2 C2.2@2173.23,1416.84
  Bottom Layer w10: v1(1780,1590) v1(1780,1430) 2100,1430 v1@2110,1420 ; v1(2109.83,1416.84) 2293.16,1416.84 2360,1350 2360,1320 2390,1290 2600,1290 2700,1190 2844.14,1190 2850,1195.86 2850,2113.78 P3.10
GND: C2.1 C?.1 J1.5 J1.S1 J1.S2 J1.S3 J1.S4 J1.S5 J1.S6 J2.6 P2.9 P2.10 U1.2 U2.4 U2.18 U2.29 | length 3531.6
  Top Layer w10: P2.10 P2.9 1681.5,2068.5 1850,1900 U2.4 U2.29 U2.18 ; v1(1748.23,1503.52) 1748.23,1541.77 1730,1560 1730,1624.14 1735.86,1630 C?.1 ; v1@1750,1500 1752.6,1502.6 U1.2 ; J1.S1 2066.44,1292.81 J1.S3 J1.S4 2161.93,1220 J1.S5@2252.48,1220 ; J1.5@2255.54,1332.76 2255.54,1364.41 2235.73,1384.22 2235.73,1555.73 2410,1730 2481.18,1730 J2.6 ; J1.S2 2258.78,1335.63 2255.91,1332.76 2255.91,1266.72 2255.91,1223.43 J1.S5 J1.S6
  Bottom Layer w10: P2.9 1568.5,2068.5 1530,2030 1530,1525.86 1535.86,1520 1670,1520 1686.48,1503.52 v1(1748.23,1503.52) 1748.23,1438.23 1740,1430 1740,1390 1790,1340 2104.88,1340 J1.S1
LEDOUT1: R1.1 U2.19 | length 891.4
  Top Layer w10: U2.19 2077.5,1918.5 2116.49,1918.5 2117.41,1919.42 2146.9,1919.42 2156.31,1910 v1(2160,1910) ; v1(2390,1340) 2526.63,1340 R1.1
  Bottom Layer w10: v1(2160,1910) 2210,1860 2210,1690 2290,1610 2290,1460 2390,1360 v1(2390,1340)
LEDOUT2: R2.1 U2.20 | length 847.4
  Top Layer w10: U2.20 2077.42,1935.42 2184.58,1935.42 v1(2200,1920) ; v1(2390,1420) 2525.37,1420 R2.1
  Bottom Layer w10: v1(2200,1920) 2240,1880 2240,1710 2320,1630 2320,1490 v1(2390,1420)
MISO_0: J2.1 P2.5 U2.14 | length 1238
  Top Layer w10: U2.14@2055.5,1823 2403,1823 2435,1855 2475,1855 2504.06,1884.06 2504.06,1929.34 2468.62,1964.78 2468.62,1998.31 J2.1
  Bottom Layer w10: P2.5 1675.67,1730 1710,1730 1750,1690 2010,1690 v1(2140,1820)
MOSI_0: J2.4 P2.4 U2.13 | length 1311.5
  Top Layer w8: U2.13 2035,1795 2040,1790 2140,1790 ; v1(2140,1760) 2140,1790 ; J2.4 2549.11,1897.92 2549.11,1879.11 2510,1840 2510,1790 2470,1750 2430,1750 2390,1790 2140,1790
  Bottom Layer w10: P2.4 1614.37,1568.7 1658.7,1568.7 1760,1670 2050,1670 v1(2140,1760)
NetP1_3: P1.3 U2.26 | length 624.4
  Top Layer w10: U2.26 1982,2032 2080,2130 2293.78,2130 P1.3
NetP1_4: P1.4 U2.27 | length 550.8
  Top Layer w10: U2.27 1965,2048 2067,2150 2213.78,2150 P1.4
NetP1_5: P1.5 U2.28 | length 485.8
  Top Layer w10: U2.28 1947,2077 2040,2170 2133.78,2170 P1.5
NetP1_6: P1.6 U2.1 | length 481.9
  Top Layer w10: U2.1 1923,2103 2020,2200 2120,2200 2147.24,2227.24 P1.6
NetP1_7: P1.7 U2.2 | length 452
  Top Layer w10: U2.2 1922.5,1935.5 1894.5,1935.5 1880,1950 1880,2116.22 P1.7
NetP1_8: P1.8 U2.7 | length 617.6
  Top Layer w10: v1(1870,1820) 1872.61,1822.61 1882.61,1822.61 1906.5,1846.5 1922.5,1846.5 U2.7
  Bottom Layer w10: v1(1870,1820) 1800,1890 1800,2090 1940,2230 1940,2276.22 P1.8
NetP1_9: P1.9 U2.8 | length 675.1
  Top Layer w10: v1(1890,1790) 1923,1823 U2.8
  Bottom Layer w10: P1.9 1847.24,2197.24 1770,2120 1770,1860 1840,1790 v1(1890,1790)
NetP1_10: P1.10 U2.9 | length 755.2
  Top Layer w10: v1(1940,1760) 1965,1785 U2.9
  Bottom Layer w10: P1.10 1747.24,1832.76 1830,1750 1930,1750 v1(1940,1760)
NetP2_1: P2.1 U2.10 | length 952.3
  Top Layer w10: P2.1 1530,1352.68 1530,1570 1580,1620 1660,1620 1730,1690 1950,1690 1982,1722 U2.10
NetP2_2: P2.2 U2.11 | length 849.1
  Top Layer w10: P2.2 1550,1432.68 1550,1490 1580,1520 1670,1520 1700,1550 1700,1630 1740,1670 1960,1670 2000,1710 U2.11
NetP2_3: P2.3 U2.12 | length 881.2
  Top Layer w10: P2.3 1622.68,1460 1690,1460 1780,1370 1990,1370 2018,1398 U2.12
NetP2_7: P2.7 U2.5 | length 314.4
  Top Layer w10: P2.7 1747.98,1868.5 1761.47,1882 U2.5
NetP2_8: P2.8 U2.6 | length 550
  Top Layer w10: P2.8 1600.9,1968.5 1587.25,1954.85 1584.85,1954.85 1574.56,1944.56 1560,1930 1560,1840 1580,1820 1800,1820 1845,1865 U2.6
NetP3_1: P3.1 R1.2 | length 234.2
  Top Layer w10: R1.2 2725.2,1338.58 P3.1
NetP3_2: P3.2 R2.2 | length 225.4
  Top Layer w10: R2.2 2746.46,1417.32 P3.2
NetP3_3: P3.3 R3.2 | length 216.6
  Top Layer w10: R3.2 2759.86,1496.06 2787.42,1468.5 P3.3
NetP3_4: P3.4 R4.2 | length 207.8
  Top Layer w10: R4.2 2596.36,1568.5 P3.4
NetR3_1: R3.1 U2.21 | length 804.3
  Top Layer w10: U2.21 2214.5,1953 2227.5,1940 v1(2230,1940) ; v1(2390,1500) 2524.11,1500 R3.1
  Bottom Layer w10: v1(2230,1940) 2270,1900 2270,1720 2350,1640 2350,1540 v1(2390,1500)
NetR4_1: R4.1 U2.22 | length 788.1
  Top Layer w10: U2.22 2243,1977 v1(2260,1960) ; v1(2390,1580) 2393.69,1580 2398.88,1574.8 R4.1
  Bottom Layer w10: v1(2260,1960) 2300,1920 2300,1730 2390,1640 v1(2390,1580)
RST: J2.5 P3.7 U2.25 | length 1087.8
  Top Layer w10: U2.25 2000,2020 2070,2090 v1(2160,2090)
  Bottom Layer w10: v1(2160,2090) 2280,2090 2400,1970 2400,1835.86 2418.42,1817.44 2449.49,1817.44 J2.5 2467.87,1807.87 2522.87,1862.87 2789.65,1862.87 P3.7
SCK_0: J2.3 P2.6 U2.15 | length 987
  Top Layer w10: U2.15 2398.18,1847 J2.3
  Bottom Layer w10: P2.6 1731.5,1768.5 1780,1720 1990,1720 v1(2120,1850)
SCL_0: P3.6 U2.24 | length 1030.5
  Top Layer w10: U2.24 2018.5,1977.5 2018.5,2001.13 2067.37,2050 v1(2100,2050)
  Bottom Layer w10: v1(2100,2050) 2270,2050 2370,1950 2370,1800 2407.13,1762.87 2789.65,1762.87 P3.6
SDA_0: P3.5 U2.23 | length 1016.2
  Top Layer w10: U2.23 2035.5,1977.5 2035.5,1995.5 2050,2010 v1(2130,2010)
  Bottom Layer w10: v1(2130,2010) 2140,2020 2250,2020 2330,1940 2330,1800 2461.5,1668.5 P3.5
VCC: C?.2 J2.2 P1.1 P1.2 P3.8 P3.9 U1.5 U2.3 U2.16 U2.17 | length 2375.9
  Top Layer w10: v1(1840,1970) 1840,1967.37 1889.37,1918 U2.3 ; C?.2 1901.76,1630 1920,1611.76 1920,1600 ; U1.5 1920,1600 ; v1(1960,1600) 1920,1600 ; U2.16@2077,1867.5 U2.17 2372,1882 2400,1910 2400,2050 2410,2060 2530,2060 ; P1.1 P1.2 2547.24,2077.24 2530,2060 ; P3.8 2785.89,1977.89 2764.63,1977.89 2734.65,2007.87 ; P3.9 2734.65,2007.87 ; 2530,2060 2549.49,2040.51 2549.49,2017.44 J2.2 2734.65,2007.87
  Bottom Layer w10: v1(1840,1970) 2050,1970 v1(2140,1880) 2170,1850 2170,1710 2060,1600 v1(1960,1600)
pads on no net: J1.2 J1.3 J1.4 U1.4

## Silkscreen, mask and mechanical layers (free items; w line width, h text height)
Board Outline:
  lines w10: 2874.02,2322.83 2874.02,1181.1 2834.65,1141.73 1535.43,1141.73 1496.06,1181.1 1496.06,2322.83 1535.43,2362.2 2834.65,2362.2 2874.02,2322.83 ; 2874.02,2322.83 2874.02,2322.83